# EAGLE board EC-TDS-PPM1_3 (EAGLE 7.5.0)
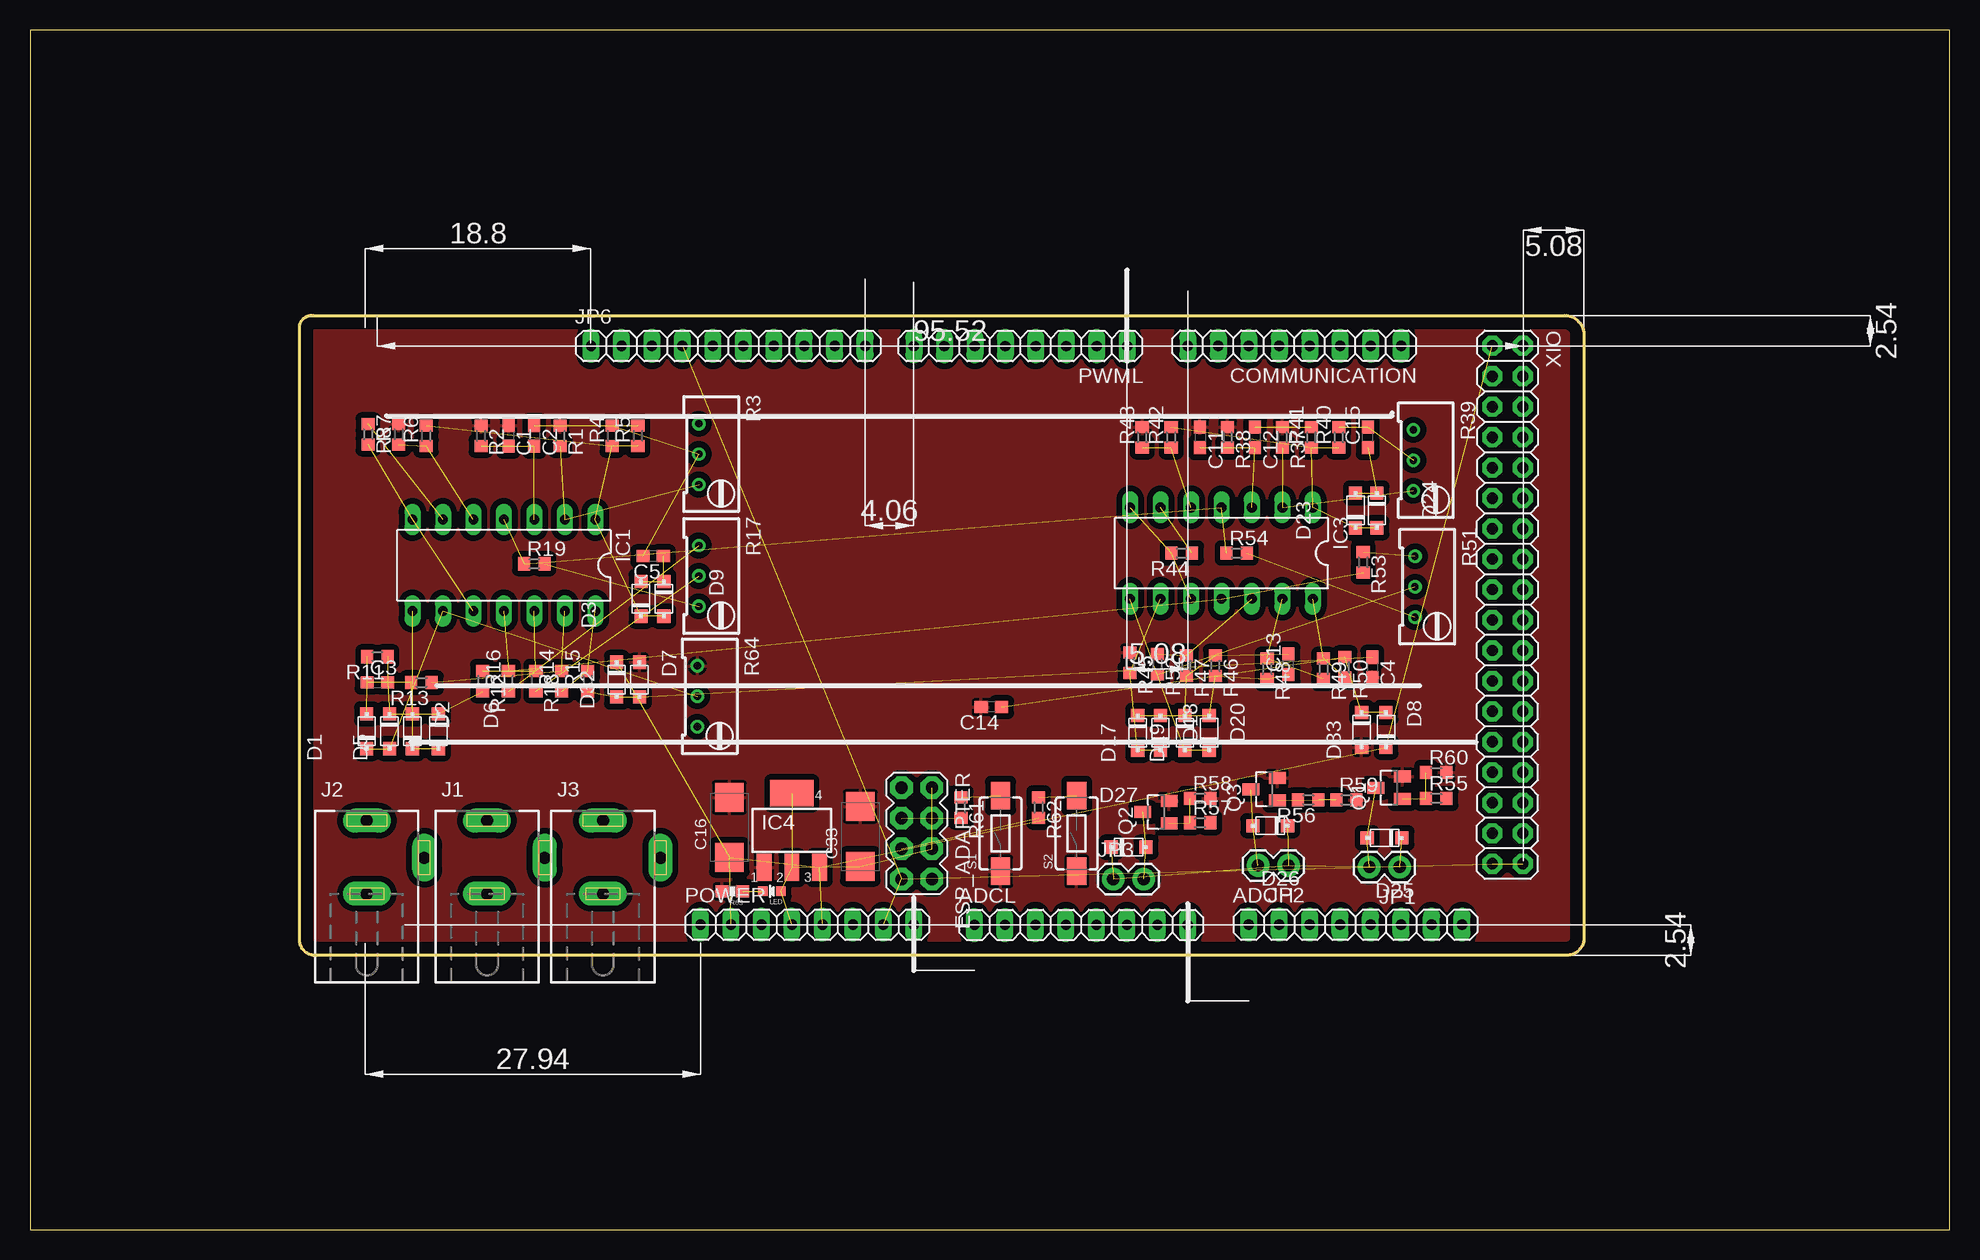
[diagram p0: board, top side]
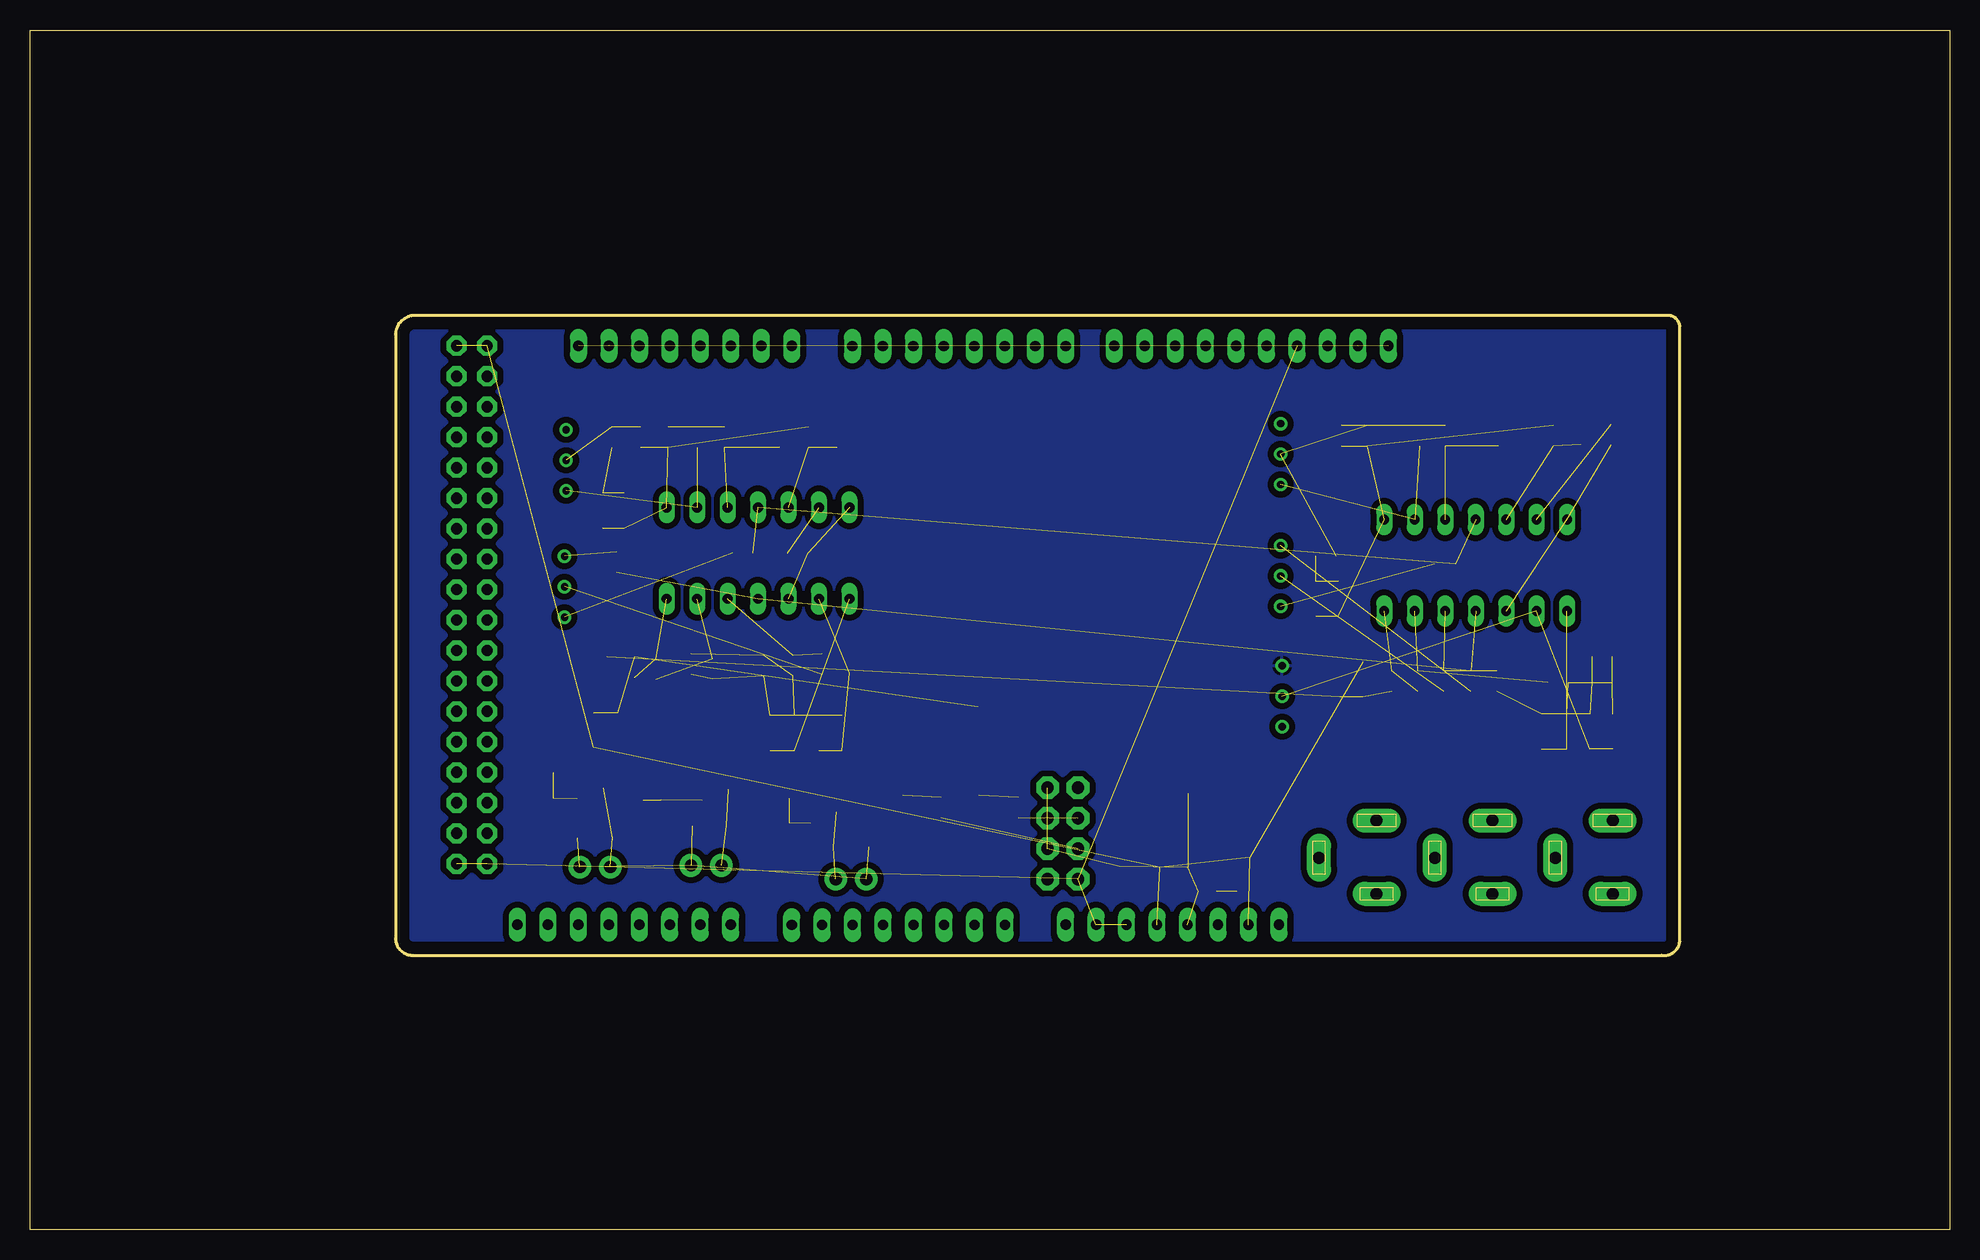
[diagram p1: board, bottom side, seen from below]

Size 160 x 100 mm. Coordinates in mm from the lower left corner, seen from the top.
Outline: 0,0 160,0 160,100 0,100 0,0
Outline: 23.61,76.19 127.92,76.19 arc-90 129.54,74.57 129.54,24.3 arc-90 128.1,22.86 23.99,22.86 arc-90 22.48,23.98 22.48,75.32 arc-90 23.61,76.19
Copper layers (1*16): Top 0.035mm / dielectric 1.5mm / Bottom 0.035mm
Design rules "default": minimum track width 10mil, minimum drill 24mil, track to track 8mil, track to pad 8mil, pad to pad 8mil, via to via 8mil, smd to smd 8mil, copper to edge 40mil, drill to drill 8mil, minimum pad ring 10mil, minimum via ring 8mil, stop-mask expansion 4mil, vias tented up to drill 0mil, thermal gap 10mil
Net classes: 0 default: width 0.203 mm, drill 0.406 mm, clearance 0.203 mm; 1 power: width 0.61 mm, drill 0.406 mm, clearance 0.203 mm; 2 gnd: width 0.305 mm, drill 0.406 mm, clearance 0.203 mm; 3 power usb: width 0.508 mm, drill 0.406 mm, clearance 0.203 mm

## Footprints (pad centres in the part's own frame; a part is rotated, then mirrored left to right if it is on the bottom)
1X08 = drill 0.85 pad 1.422 long: 1 -8.89,0; 2 -6.35,0; 3 -3.81,0; 4 -1.27,0; 5 1.27,0; 6 3.81,0; 7 6.35,0; 8 8.89,0
C0603 = smd 1.1 x 1: 1 -0.85,0; 2 0.85,0
SMC_C = smd 2.4 x 2.4: + -2.5,0; - 2.5,0
SOT123F = smd 1.1 x 1.1: A 1.45,0; C -1.45,0
2X4 = drill 1.016 pad 1.88 octagon: 1 -3.81,-1.27; 2 -3.81,1.27; 3 -1.27,-1.27; 4 -1.27,1.27; 5 1.27,-1.27; 6 1.27,1.27; 7 3.81,-1.27; 8 3.81,1.27
DIL14 = drill 0.813 long: 1 -7.62,-3.81; 2 -5.08,-3.81; 3 -2.54,-3.81; 4 0,-3.81; 5 2.54,-3.81; 6 5.08,-3.81; 7 7.62,-3.81; 8 7.62,3.81; 9 5.08,3.81; 10 2.54,3.81; 11 0,3.81; 12 -2.54,3.81; 13 -5.08,3.81; 14 -7.62,3.81
LINEAR_SOT223 = smd 1.219 x 2.235: 1 -2.311,-3.099; 2 0,-3.099; 3 2.311,-3.099 | smd 3.6 x 2.2: 4 0,3.099
DCJ0202 = drill 1 pad 2 long: 1 0,3.1; 2 4.8,0; 3 0,-3
1X02 = drill 1.016 pad 1.88: 1 0,0; 2 2.54,0
1X10 = drill 0.85 pad 1.422 long: 1 -11.43,0; 2 -8.89,0; 3 -6.35,0; 4 -3.81,0; 5 -1.27,0; 6 1.27,0; 7 3.81,0; 8 6.35,0; 9 8.89,0; 10 11.43,0
SPARKFUN_LED-0603 = smd 0.8 x 0.8: A 0,-0.75; C 0,0.75
SOT23 = smd 1 x 1.4: 1 -0.95,-1.1; 2 0.95,-1.1; 3 0,1.1
R0603 = smd 1 x 1.1: 1 -0.85,0; 2 0.85,0
RTRIM64W = drill 0.61: 1 1.27,-2.54; 2 1.27,0; 3 1.27,2.54
SPARKFUN_0603-RES = smd 1.1 x 1: 1 -0.85,0; 2 0.85,0
TACTILE-SWITCH-1101NE = smd 2.3 x 1.6: 1 -3.15,0; 2 3.15,0
2X18 = drill 0.95 pad 1.676 octagon: 1 -21.59,-1.27; 2 -21.59,1.27; 3 -19.05,-1.27; 4 -19.05,1.27; 5 -16.51,-1.27; 6 -16.51,1.27; 7 -13.97,-1.27; 8 -13.97,1.27; 9 -11.43,-1.27; 10 -11.43,1.27; 11 -8.89,-1.27; 12 -8.89,1.27; 13 -6.35,-1.27; 14 -6.35,1.27; 15 -3.81,-1.27; 16 -3.81,1.27; 17 -1.27,-1.27; 18 -1.27,1.27; 19 1.27,-1.27; 20 1.27,1.27; 21 3.81,-1.27; 22 3.81,1.27; 23 6.35,-1.27; 24 6.35,1.27; 25 8.89,-1.27; 26 8.89,1.27; 27 11.43,-1.27; 28 11.43,1.27; 29 13.97,-1.27; 30 13.97,1.27; 31 16.51,-1.27; 32 16.51,1.27; 33 19.05,-1.27; 34 19.05,1.27; 35 21.59,-1.27; 36 21.59,1.27

## Placement (x,y rotation side)
ADCH  8x1F-H8.5  [1X08]  110.48,25.41 0 top
ADCL  8x1F-H8.5  [1X08]  87.62,25.39 0 top
C1  0.015u  [C0603]  39.88,66.17 270 top
C2  0.015u  [C0603]  42.04,66.17 270 top
C3  0.22u  [C0603]  28.96,45.59 0 top
C4  0.22u  [C0603]  111.89,46.86 270 top
C5  100n  [C0603]  51.94,56.13 180 top
C11  0.015u  [C0603]  97.54,66.04 270 top
C12  0.015u  [C0603]  102.11,66.04 270 top
C13  0.22u  [C0603]  104.9,47.12 90 top
C14  0.22u  [C0603]  80.14,43.56 180 top
C15  100n  [C0603]  111.51,66.04 90 top
C16  [SMC_C]  58.29,33.53 90 top
C33  [SMC_C]  69.22,32.77 90 top
COMMUNICATION  8x1F-H8.5  [1X08]  105.4,73.67 180 top
D1  PMEG2010AEH  [SOT123F]  28.07,41.53 90 top
D2  PMEG2010AEH  [SOT123F]  29.97,41.53 270 top
D3  PMEG2010AEH  [SOT123F]  50.93,52.58 90 top
D5  PMEG2010AEH  [SOT123F]  31.88,41.53 90 top
D6  PMEG2010AEH  [SOT123F]  34.04,41.53 270 top
D7  PMEG2010AEH  [SOT123F]  48.9,45.85 270 top
D8  PMEG2010AEH  [SOT123F]  111,41.66 270 top
D9  PMEG2010AEH  [SOT123F]  52.83,52.58 270 top
D17  PMEG2010AEH  [SOT123F]  94.23,41.4 90 top
D18  PMEG2010AEH  [SOT123F]  92.33,41.4 270 top
D19  PMEG2010AEH  [SOT123F]  98.3,41.4 90 top
D20  PMEG2010AEH  [SOT123F]  96.27,41.4 270 top
D23  PMEG2010AEH  [SOT123F]  110.49,59.94 90 top
D24  PMEG2010AEH  [SOT123F]  112.27,59.94 270 top
D25  PMEG2010AEH  [SOT123F]  112.9,32.64 180 top
D26  PMEG2010AEH  [SOT123F]  103.38,33.66 180 top
D27  PMEG2010AEH  [SOT123F]  91.57,31.88 0 top
D32  PMEG2010AEH  [SOT123F]  50.8,45.85 90 top
D33  PMEG2010AEH  [SOT123F]  113.03,41.66 90 top
ESP_ADAPTER  [2X4]  73.91,33.02 270 top
IC1  TL084P  [DIL14]  39.5,55.37 180 top
IC3  TL084P  [DIL14]  99.31,56.39 180 top
IC4  LINEAR_MC33269ST-3.3T3  [LINEAR_SOT223]  63.5,33.27 0 top
J1  DCJ0202  [DCJ0202]  38.1,30.99 0 top
J2  DCJ0202  [DCJ0202]  28.07,30.99 0 top
J3  DCJ0202  [DCJ0202]  47.75,30.99 0 top
JP1  [1X02]  114.17,30.23 180 top
JP2  [1X02]  104.9,30.35 180 top
JP3  [1X02]  90.3,29.21 0 top
JP6  10x1F-H8.5  [1X10]  58.19,73.66 0 top
LED  [SPARKFUN_LED-0603]  61.85,28.19 90 top
POWER  8x1F-H8.5  [1X08]  64.78,25.41 0 top
PWML  8x1F-H8.5  [1X08]  82.56,73.65 180 top
Q1  VSK_N_FET_TO23  [SOT23]  113.28,36.83 90 top
Q2  VSK_N_FET_TO23  [SOT23]  93.85,34.8 90 top
Q3  VSK_N_FET_TO23  [SOT23]  102.87,36.7 90 top
R1  [R0603]  44.2,66.17 270 top
R2  1k  [R0603]  37.59,66.17 270 top
R3  [RTRIM64W]  57.02,64.64 180 top
R4  56k  [R0603]  48.51,66.17 90 top
R5  1K  [R0603]  50.67,66.17 90 top
R6  100K  [R0603]  33.02,66.17 90 top
R7  1k  [R0603]  30.73,66.29 90 top
R8  6.8K  [R0603]  28.19,66.29 270 top
R11  22k  [R0603]  28.96,47.75 180 top
R12  220K  [R0603]  37.72,45.72 270 top
R13  220K  [R0603]  32.64,45.59 180 top
R14  220K  [R0603]  44.32,45.72 90 top
R15  3.9k  [R0603]  46.48,45.72 90 top
R16  82k  [R0603]  39.88,45.72 90 top
R17  50k  [RTRIM64W]  57.02,54.48 180 top
R18  100k  [R0603]  42.16,45.72 270 top
R19  100k  [R0603]  42.04,55.5 0 top
R37  [R0603]  104.39,66.04 270 top
R38  1k  [R0603]  99.82,66.04 270 top
R39  [RTRIM64W]  116.59,64.14 180 top
R40  56k  [R0603]  109.09,66.04 90 top
R41  1K  [R0603]  106.81,66.04 90 top
R42  100K  [R0603]  95.12,66.04 90 top
R43  1k  [R0603]  92.71,66.04 90 top
R44  6.8K  [R0603]  96.01,56.39 180 top
R45  1.5k  [R0603]  91.69,47.24 270 top
R46  22k  [R0603]  98.81,46.99 270 top
R47  220K  [R0603]  96.39,46.99 270 top
R48  220K  [R0603]  103.12,46.74 270 top
R49  220K  [R0603]  107.82,46.74 270 top
R50  3.9k  [R0603]  109.6,46.86 270 top
R51  50k  [RTRIM64W]  116.71,53.59 180 top
R52  100k  [R0603]  93.98,47.12 270 top
R53  82k  [R0603]  111.12,55.63 270 top
R54  100k  [R0603]  100.58,56.39 0 top
R55  1K  [R0603]  117.22,35.94 0 top
R56  1K  [R0603]  106.55,35.81 180 top
R57  1K  [R0603]  97.54,33.91 0 top
R58  1K  [R0603]  97.54,35.94 0 top
R59  1K  [R0603]  109.73,35.81 0 top
R60  1K  [R0603]  117.22,38.1 0 top
R61  100k  [R0603]  77.6,35.18 270 top
R62  100k  [R0603]  84.07,35.18 270 top
R63  [SPARKFUN_0603-RES]  58.55,28.19 180 top
R64  50k  [RTRIM64W]  56.9,44.45 180 top
S1  SWITCH-MOMENTARY-2SMD-1101NE  [TACTILE-SWITCH-1101NE]  80.9,33.02 90 top
S2  SWITCH-MOMENTARY-2SMD-1101NE  [TACTILE-SWITCH-1101NE]  87.25,33.02 90 top
XIO  18x2F-H8.5  [2X18]  123.16,52.08 270 top

## Library data of the parts
ADCH ADCL COMMUNICATION JP6 POWER PWML XIO = SmartPrj
C1-C5 C11-C15 R1-R8 R11-R19 R37-R62 R64 = resistor
C16 C33 = rcl
D1-D3 D5-D9 D17-D20 D23-D27 D32 D33 = Enleka_Diode; PARTNO: PMEG2010AEH,115
ESP_ADAPTER JP1-JP3 = SparkFun-Connectors
IC1 IC3 = linear
IC4 = Robotech_Other
J1-J3 = con-jack; OC_FARNELL: unknown; OC_NEWARK: unknown
LED = Robotech RLC of Chung
Q1-Q3 = transistor-fet
R63 = Robotech_RCL
S1 S2 = SparkFun-Electromechanical; PROD_ID: SWCH-00815

## Nets
+3V3: C33.+ ESP_ADAPTER.2 ESP_ADAPTER.6 IC4.2 IC4.4 LED.A POWER.4
+5V: C16.+ D7.C D33.C IC4.3 POWER.2 POWER.5 XIO.1 XIO.2
+6V: D25.C D26.C D27.C JP1.1 JP2.1 JP3.1
ADC0: ADCL.1
ADC1: ADCL.2
ADC2: ADCL.3
ADC3: ADCL.4
ADC4: ADCL.5
ADC5: ADCL.6
ADC6: ADCL.7
ADC7: ADCL.8
ADC8: ADCH.1
ADC9: ADCH.2
ADC10: ADCH.3
ADC11: ADCH.4
ADC12: ADCH.5
ADC13: ADCH.6
ADC14: ADCH.7
ADC15: ADCH.8
AIN1: IC1.6 R8.1
AIN3: IC3.6 R44.1
ANALOG_OUT1: C4.1 D7.A D32.C R15.1
ANALOG_OUT3: C14.1 D8.C D33.A R50.1
AREF: JP6.3
GND: ESP_ADAPTER.7 JP6.4 POWER.6 POWER.7 XIO.35 XIO.36
GND1: C1.1 C4.2 C11.1 C14.2 C16.- C33.- D8.A D32.A IC4.1 Q1.2 Q2.2 Q3.2 R1.1 R2.1 R7.2 R37.1 R38.1 R43.2 R45.1 R58.2 R59.2 R60.2 R63.2 R64.1 S1.1 S2.1
GPIO0: ESP_ADAPTER.3 R61.2
GPIO2: ESP_ADAPTER.5 R62.2
N$1: IC1.2 R1.2 R3.3
N$2: C2.1 R5.2
N$3: C1.2 C2.2 IC1.3 R2.2
N$4: IC1.5 R6.1 R7.1
N$5: C5.2 R3.2 R4.2
N$6: R16.1 R17.1
N$7: D3.C D9.A IC1.1 R4.1 R5.1 R6.2
N$8: C5.1 D3.A D9.C
N$9: IC1.7 IC1.10 R8.2
N$10: R17.3 R19.2
N$11: IC1.13 R13.1 R14.2
N$12: C3.1 D1.A D5.A R11.2 R13.2
N$13: D1.C D2.A IC1.9 R64.2
N$14: C3.2 D2.C D6.C R11.1 R12.2
N$15: D5.C D6.A IC1.8
N$16: IC1.12 R12.1 R18.1
N$17: IC1.14 R14.1 R15.2
N$18: R17.2 R18.2
N$37: IC3.2 R37.2 R39.3
N$38: C11.2 C12.2 IC3.3 R38.2
N$39: C15.2 R39.2 R40.2
N$40: D23.C D24.A IC3.1 R40.1 R41.1 R42.2
N$41: C12.1 R41.2
N$42: IC3.5 R42.1 R43.1
N$43: IC3.7 IC3.10 R44.2
N$44: C13.1 D17.A D19.A R46.2 R48.2
N$45: D17.C D18.A IC3.9 R45.2
N$46: C13.2 D18.C D20.C R46.1 R47.2
N$47: D19.C D20.A IC3.8
N$48: IC3.13 R48.1 R49.2
N$49: IC3.12 R47.1 R52.1
N$50: IC3.14 R49.1 R50.2
N$51: C15.1 D23.A D24.C
N$52: R51.1 R53.1
N$53: R51.3 R54.2
N$54: R51.2 R52.2
N$55: D26.A JP2.2 Q3.3
N$56: D27.A JP3.2 Q2.3
N$57: D25.A JP1.2 Q1.3
N$58: Q2.1 R57.1 R58.1
N$59: Q3.1 R56.1 R59.1
N$61: Q1.1 R55.1 R60.1
N$62: R61.1 S1.2
N$63: R62.1 S2.2
N$64: LED.C R63.1
PA0: XIO.3
PA1: XIO.4
PA2: XIO.5
PA3: XIO.6
PA4: XIO.7
PA5: XIO.8
PA6: XIO.9
PA7: XIO.10
PB0: XIO.34
PB1: XIO.33
PB2: XIO.32
PB3: XIO.31
PB4: JP6.8
PB5: JP6.7
PB6: JP6.6
PB7: JP6.5
PC0: XIO.18
PC1: XIO.17
PC2: XIO.16
PC3: XIO.15
PC4: XIO.14
PC5: XIO.13
PC6: XIO.12
PC7: XIO.11
PD7: XIO.19
PE0: PWML.1
PE1: PWML.2
PE3: PWML.6
PE4: PWML.3
PE5: PWML.4
PG0: XIO.22
PG1: XIO.21
PG2: XIO.20
PG5: PWML.5
PH3: PWML.7
PH4: PWML.8
PH5: JP6.10
PH6: JP6.9
PL0: XIO.30
PL1: XIO.29
PL2: XIO.28
PL3: XIO.27
PL4: XIO.26
PL5: XIO.25
PL6: XIO.24
PL7: XIO.23
PWM1: R55.2
PWM2: R56.2
PWM3: R57.2
RST: ESP_ADAPTER.4
RX: ESP_ADAPTER.1
RXD1: COMMUNICATION.3
RXD2: COMMUNICATION.5
RXD3: COMMUNICATION.7
SCL: COMMUNICATION.1 JP6.1
SDA: COMMUNICATION.2 JP6.2
TX: ESP_ADAPTER.8
TXD1: COMMUNICATION.4
TXD2: COMMUNICATION.6
TXD3: COMMUNICATION.8
V+: IC1.4 IC3.4 R19.1 R54.1
V-: IC1.11 IC3.11 R16.2 R53.2
VIN [power]: POWER.8

## Tracks (layer width: path | path; a pad name or v marks a point on that pad's centre or on a via)
+3V3  (6 unrouted)
+5V  (7 unrouted)
+6V  (5 unrouted)
AIN1  (1 unrouted)
AIN3  (1 unrouted)
ANALOG_OUT1  (3 unrouted)
ANALOG_OUT3  (3 unrouted)
GND  (5 unrouted)
GND1
  pour Bottom (isolate 0.508): 22.48,76.2 22.48,22.86 129.54,22.86 129.54,76.2
  pour Top (isolate 0.508): 22.48,76.2 22.48,22.86 129.54,22.86 129.54,76.2
GPIO0  (1 unrouted)
GPIO2  (1 unrouted)
N$1  (2 unrouted)
N$2  (1 unrouted)
N$3  (3 unrouted)
N$4  (2 unrouted)
N$5  (2 unrouted)
N$6  (1 unrouted)
N$7  (5 unrouted)
N$8  (2 unrouted)
N$9  (2 unrouted)
N$10  (1 unrouted)
N$11  (2 unrouted)
N$12  (4 unrouted)
N$13  (3 unrouted)
N$14  (4 unrouted)
N$15  (2 unrouted)
N$16  (2 unrouted)
N$17  (2 unrouted)
N$18  (1 unrouted)
N$37  (2 unrouted)
N$38  (3 unrouted)
N$39  (2 unrouted)
N$40  (5 unrouted)
N$41  (1 unrouted)
N$42  (2 unrouted)
N$43  (2 unrouted)
N$44  (4 unrouted)
N$45  (3 unrouted)
N$46  (4 unrouted)
N$47  (2 unrouted)
N$48  (2 unrouted)
N$49  (2 unrouted)
N$50  (2 unrouted)
N$51  (2 unrouted)
N$52  (1 unrouted)
N$53  (1 unrouted)
N$54  (1 unrouted)
N$55  (2 unrouted)
N$56  (2 unrouted)
N$57  (2 unrouted)
N$58  (2 unrouted)
N$59  (2 unrouted)
N$61  (2 unrouted)
N$62  (1 unrouted)
N$63  (1 unrouted)
N$64  (1 unrouted)
SCL  (1 unrouted)
SDA  (1 unrouted)
V+  (3 unrouted)
V-  (3 unrouted)